# Altium PCB PCB1.pcbdoc (part 1 of 2)
Units mm, origin at the board's own origin, x right, y up, seen from the top; angles counter-clockwise.
Board outline 100 x 24 mm, 4 copper layers (Top Layer 1, GND, VCC, Bottom Layer 1), stack 0.567 mm thick; 90 components, 59 nets, 339 pads, 337 vias.
Unrouted connection lines stored in the file: 82.
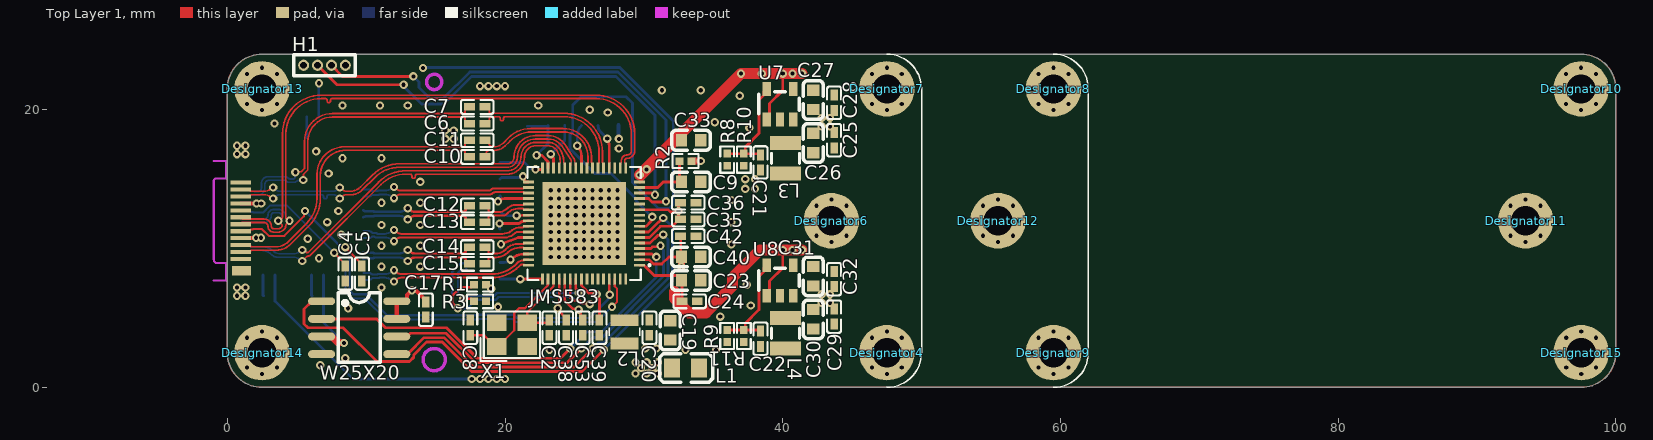
[diagram p0: Top Layer 1 view]
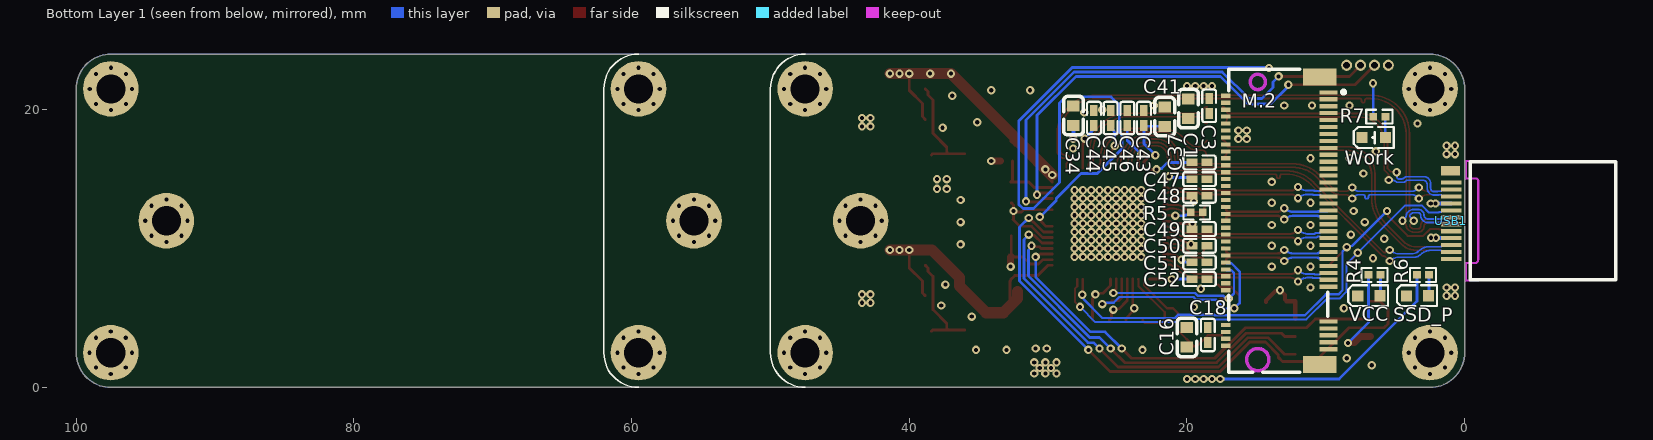
[diagram p1: Bottom Layer 1 view, seen from below]
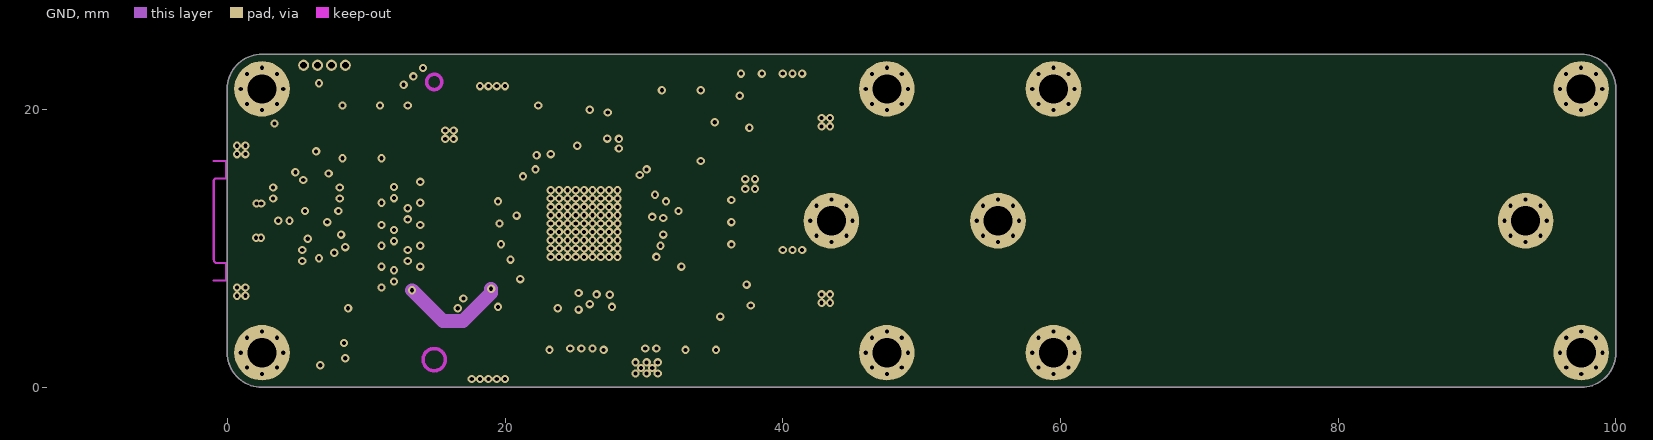
[diagram p2: GND]
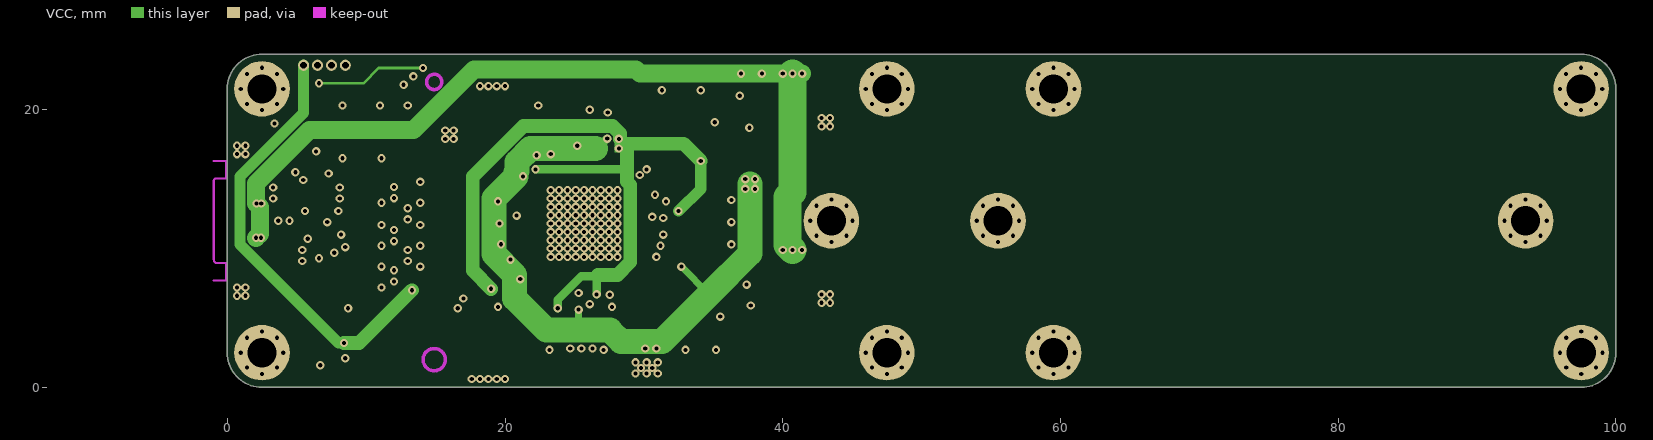
[diagram p3: VCC]

## Layer stack, top to bottom
Top Solder Mask Layer: solder mask 0.0102, Solder Resist, Dk 3.5
Top Layer 1: signal copper 0.035
Dielectric 1: prepreg 0.0711, PP-006, Dk 4.1
GND: signal copper 0.0175
Dielectric1: dielectric 0.32, FR-4, Dk 4.8
VCC: signal copper 0.0175
Dielectric 2: prepreg 0.0711, PP-006, Dk 4.1
Bottom Layer 1: signal copper 0.035
Bottom Solder Mask Layer: solder mask 0.0102, Solder Resist, Dk 3.5

## Board outline
0,2.5 0,21.5 cw(c2.5,21.5) 2.5,24 97.5,24 cw(c97.5,21.5) 100,21.5 100,2.5 cw(c97.5,2.5) 97.5,0 2.5,0 cw(c2.5,2.5)

## Design rules (kind name [scope] priority, off if disabled: settings)
AssemblyTestPointUsage [All] p0: scope1count=1 scope1_0_kind=Board scope1_0_value=Board scope2count=1 scope2_0_kind=Board scope2_0_value=Board commentlength=0
AssemblyTestpoint [All] p0: scope1count=1 scope1_0_kind=Board scope1_0_value=Board scope2count=1 scope2_0_kind=Board scope2_0_value=Board commentlength=0
BoardOutlineClearance copperThickness1oz_1 [All] p0: scope1count=1 scope1_0_kind=Board scope1_0_value=Board scope2count=1 scope2_0_kind=Board scope2_0_value=Board commentlength=0 gap=0.254
BoardOutlineClearance copperThickness2oz_1 [All] p0: scope1count=1 scope1_0_kind=Board scope1_0_value=Board scope2count=1 scope2_0_kind=Board scope2_0_value=Board commentlength=0 gap=0.254
BoardOutlineClearance copperThickness1oz_1 [All] p1: gap=0.254 ignorepadtopadclearanceinfootprint=FALSE except(0: Arc-SplitContinuation Track-SplitContinuation SMDPad-SplitContinuation THPad-SplitContinuation Via-SplitContinuation Fill-SplitContinuation Poly-SplitContinuation Region-SplitContinuation Text-SplitContinuation; 0.152: Track-CutoutEdge SMDPad-CutoutEdge THPad-CutoutEdge Via-CutoutEdge Region-CutoutEdge; 0.3: Track-OutlineEdge SMDPad-OutlineEdge THPad-OutlineEdge Via-OutlineEdge Fill-OutlineEdge Fill-CutoutEdge Poly-OutlineEdge Region-OutlineEdge Text-OutlineEdge)
BoardOutlineClearance copperThickness2oz_1 [All] p2: gap=0.254 ignorepadtopadclearanceinfootprint=FALSE except(0: Arc-SplitContinuation Track-SplitContinuation SMDPad-SplitContinuation THPad-SplitContinuation Via-SplitContinuation Fill-SplitContinuation Poly-SplitContinuation Region-SplitContinuation Text-SplitContinuation; 0.152: Track-CutoutEdge SMDPad-CutoutEdge THPad-CutoutEdge Via-CutoutEdge Region-CutoutEdge; 0.3: Track-OutlineEdge SMDPad-OutlineEdge THPad-OutlineEdge Via-OutlineEdge Fill-OutlineEdge Fill-CutoutEdge Poly-OutlineEdge Region-OutlineEdge Text-OutlineEdge)
Clearance "Stitching GND" [All] p0 off: scope1count=1 scope1_0_kind=Board scope1_0_value=Board scope2count=1 scope2_0_kind=Board scope2_0_value=Board commentlength=80 gap=0.2 // Protel DXP Scope 2 Expression Was: (IsVia and (Not IsStitchingVia)) Or IsPad
Clearance copperThickness1oz [All] p0: scope1count=1 scope1_0_kind=Board scope1_0_value=Board scope2count=1 scope2_0_kind=Board scope2_0_value=Board commentlength=0 gap=0.15
Clearance "Stitching GND" [IsStitchingVia and InNet('GND') vs (IsVia and (Not IsStitchingVia)) Or IsPad] p1: gap=0.2 ignorepadtopadclearanceinfootprint=FALSE except(0: Arc-Text Arc-Hole Track-Text Track-Hole SMDPad-Text SMDPad-Hole THPad-Text THPad-Hole Via-Text Via-Hole Fill-Text Fill-Hole Poly-Text Poly-Hole Region-Text Region-Hole Text-Text Text-Hole)
Clearance copperThickness1oz [All] p2: gap=0.15 ignorepadtopadclearanceinfootprint=FALSE except(0: Arc-Text Arc-Hole Track-Text Track-Hole SMDPad-Via SMDPad-Text SMDPad-Hole THPad-Via THPad-Text THPad-Hole Via-Text Via-Hole Fill-Text Fill-Hole Poly-Text Poly-Hole Region-Text Region-Hole Text-Text Text-Hole; 0.12: Arc-Arc Arc-Track Arc-Via Track-Track Track-Via; 0.2: Via-Via)
ComponentClearance [All] p0: scope1count=1 scope1_0_kind=Board scope1_0_value=Board scope2count=1 scope2_0_kind=Board scope2_0_value=Board commentlength=0 gap=0 collisioncheckmode=3
ComponentClearance [All] p1: gap=0 collisioncheckmode=3 verticalgap=0.254 showdistances=FALSE
DiffPairsRouting DiffPairsRouting_90oum [All] p0 off: scope1count=1 scope1_0_kind=Board scope1_0_value=Board scope2count=1 scope2_0_kind=Board scope2_0_value=Board commentlength=71 // Protel DXP Scope 1 Expression Was: InDifferentialPairClass('90oum')
DiffPairsRouting DiffPairsRouting_85oum [All] p0 off: scope1count=1 scope1_0_kind=Board scope1_0_value=Board scope2count=1 scope2_0_kind=Board scope2_0_value=Board commentlength=71 // Protel DXP Scope 1 Expression Was: InDifferentialPairClass('85oum')
DiffPairsRouting DiffPairsRouting_90oum [InDifferentialPairClass('90oum')] p1: maxlimit=0.254 minlimit=0.1 mostfreqgap=0.12 toplayer_minwidth=0.1 toplayer_maxwidth=0.381 toplayer_prefwidth=0.125 midlayer1_minwidth=0.1 midlayer1_maxwidth=0.381 midlayer1_prefwidth=0.125 midlayer2_minwidth=0.1 midlayer2_maxwidth=0.381 midlayer2_prefwidth=0.125 bottomlayer_minwidth=0.1 bottomlayer_maxwidth=0.381 bottomlayer_prefwidth=0.125 maxuncoupledlength=12.7
DiffPairsRouting DiffPairsRouting_85oum [InDifferentialPairClass('85oum')] p2: maxlimit=0.254 minlimit=0.1 mostfreqgap=0.12 toplayer_minwidth=0.1 toplayer_maxwidth=0.381 toplayer_prefwidth=0.145 midlayer1_minwidth=0.1 midlayer1_maxwidth=0.381 midlayer1_prefwidth=0.145 midlayer2_minwidth=0.1 midlayer2_maxwidth=0.381 midlayer2_prefwidth=0.145 bottomlayer_minwidth=0.1 bottomlayer_maxwidth=0.381 bottomlayer_prefwidth=0.145 maxuncoupledlength=12.7
FabricationTestPointUsage [All] p0: scope1count=1 scope1_0_kind=Board scope1_0_value=Board scope2count=1 scope2_0_kind=Board scope2_0_value=Board commentlength=0 valid=0 allowmultiple=FALSE
FabricationTestpoint [All] p0: scope1count=1 scope1_0_kind=Board scope1_0_value=Board scope2count=1 scope2_0_kind=Board scope2_0_value=Board commentlength=0 side=3 testpointundercomponent=TRUE minsize=1.016 maxsize=2.54 preferedsize=1.524 minholesize=0 maxholesize=1.016 preferedholesize=0.813 testpointgrid=0.025
FanoutControl Fanout_BGA [All] p0 off: scope1count=1 scope1_0_kind=Board scope1_0_value=Board scope2count=1 scope2_0_kind=Board scope2_0_value=Board commentlength=69 // Protel DXP Scope 1 Expression Was: IsBGA   Fanout_BGA (Default Rule)
FanoutControl Fanout_LCC [All] p0 off: scope1count=1 scope1_0_kind=Board scope1_0_value=Board scope2count=1 scope2_0_kind=Board scope2_0_value=Board commentlength=69 // Protel DXP Scope 1 Expression Was: IsLCC   Fanout_LCC (Default Rule)
FanoutControl Fanout_SOIC [All] p0 off: scope1count=1 scope1_0_kind=Board scope1_0_value=Board scope2count=1 scope2_0_kind=Board scope2_0_value=Board commentlength=71 // Protel DXP Scope 1 Expression Was: IsSOIC   Fanout_SOIC (Default Rule)
FanoutControl Fanout_Small [All] p0 off: scope1count=1 scope1_0_kind=Board scope1_0_value=Board scope2count=1 scope2_0_kind=Board scope2_0_value=Board commentlength=84 // Protel DXP Scope 1 Expression Was: (CompPinCount < 5)   Fanout_Small (Default Rule)
FanoutControl Fanout_Default [All] p0: scope1count=1 scope1_0_kind=Board scope1_0_value=Board scope2count=1 scope2_0_kind=Board scope2_0_value=Board commentlength=30 // Fanout_Default (Default Rule)
Height [All] p0: scope1count=1 scope1_0_kind=Board scope1_0_value=Board scope2count=1 scope2_0_kind=Board scope2_0_value=Board commentlength=0
HoleSize [All] p0: scope1count=1 scope1_0_kind=Board scope1_0_value=Board scope2count=1 scope2_0_kind=Board scope2_0_value=Board commentlength=0 absolutevalues=TRUE maxlimit=2.54 minlimit=0.025 maxpercent=80.000 minpercent=20.000
HoleToHoleClearance [All] p0: scope1count=1 scope1_0_kind=Board scope1_0_value=Board scope2count=1 scope2_0_kind=Board scope2_0_value=Board commentlength=0
LayerPairs [All] p0: scope1count=1 scope1_0_kind=Board scope1_0_value=Board scope2count=1 scope2_0_kind=Board scope2_0_value=Board commentlength=0 enforce=TRUE
MatchedLengths [All] p0: scope1count=1 scope1_0_kind=Board scope1_0_value=Board scope2count=1 scope2_0_kind=Board scope2_0_value=Board commentlength=0 tolerance=2 amplitude=5.08 gap=0.508 style=90-Degree
MatchedLengths [All] p1: tolerance=2 checknetsindiffpair=FALSE checkdiffpairvsdiffpair=TRUE checkxsignals=TRUE checkothers=TRUE
MinimumSolderMaskSliver [All] p0: scope1count=1 scope1_0_kind=Board scope1_0_value=Board scope2count=1 scope2_0_kind=Board scope2_0_value=Board commentlength=0
NetAntennae [All] p0: scope1count=1 scope1_0_kind=Board scope1_0_value=Board scope2count=1 scope2_0_kind=Board scope2_0_value=Board commentlength=0
PasteMaskExpansion pasteMaskExpansion [All] p0: scope1count=1 scope1_0_kind=Board scope1_0_value=Board scope2count=1 scope2_0_kind=Board scope2_0_value=Board commentlength=0 expansion=0
PasteMaskExpansion pasteMaskExpansion [All] p1: expansion=0
PlaneClearance [All] p0: scope1count=1 scope1_0_kind=Board scope1_0_value=Board scope2count=1 scope2_0_kind=Board scope2_0_value=Board commentlength=0 clearance=0.508
PlaneConnect innerPlane [All] p0: scope1count=1 scope1_0_kind=Board scope1_0_value=Board scope2count=1 scope2_0_kind=Board scope2_0_value=Board commentlength=0 planeconnectstyle=Direct reliefexpansion=0.508 reliefentries=4 reliefconductorwidth=0.254 reliefairgap=0.254
PlaneConnect innerPlane [All] p1: planeconnectstyle=Direct reliefexpansion=0.508 reliefentries=4 reliefconductorwidth=0.254 reliefairgap=0.254
PolygonConnect copperRegion [All] p0: scope1count=1 scope1_0_kind=Board scope1_0_value=Board scope2count=1 scope2_0_kind=Board scope2_0_value=Board commentlength=0 connectstyle=Direct reliefconductorwidth=0.254 reliefentries=4 polygonreliefangle="90 Angle"
PolygonConnect copperRegion [All] p1: connectstyle=Direct reliefconductorwidth=0.254 reliefentries=4 polygonreliefangle="90 Angle" airgapwidth=0.254
RoutingCorners [All] p0: scope1count=1 scope1_0_kind=Board scope1_0_value=Board scope2count=1 scope2_0_kind=Board scope2_0_value=Board commentlength=0 cornerstyle=45-Degree minsetback=2.54 maxsetback=2.54
RoutingLayers [All] p0: scope1count=1 scope1_0_kind=Board scope1_0_value=Board scope2count=1 scope2_0_kind=Board scope2_0_value=Board commentlength=0 top layer=Automatic mid layer 1=Automatic mid layer 2=Automatic bottom layer=Automatic
RoutingPriority [All] p0: scope1count=1 scope1_0_kind=Board scope1_0_value=Board scope2count=1 scope2_0_kind=Board scope2_0_value=Board commentlength=0
RoutingTopology [All] p0: scope1count=1 scope1_0_kind=Board scope1_0_value=Board scope2count=1 scope2_0_kind=Board scope2_0_value=Board commentlength=0 topology=Shortest
RoutingVias viaSize [All] p0: scope1count=1 scope1_0_kind=Board scope1_0_value=Board scope2count=1 scope2_0_kind=Board scope2_0_value=Board commentlength=0 holewidth=0.305 width=0.61 viastyle="Through Hole" minholewidth=0.3 minwidth=0.5 maxholewidth=6.3 maxwidth=10
RoutingVias viaSize [All] p1: holewidth=0.305 width=0.61 viastyle="Through Hole" minholewidth=0.3 minwidth=0.5 maxholewidth=6.3 maxwidth=10
ShortCircuit [All] p0: scope1count=1 scope1_0_kind=Board scope1_0_value=Board scope2count=1 scope2_0_kind=Board scope2_0_value=Board commentlength=0 allowed=FALSE
SilkToBoardRegionClearance [All] p0: scope1count=1 scope1_0_kind=Board scope1_0_value=Board scope2count=1 scope2_0_kind=Board scope2_0_value=Board commentlength=0
SilkToSilkClearance [All] p0: scope1count=1 scope1_0_kind=Board scope1_0_value=Board scope2count=1 scope2_0_kind=Board scope2_0_value=Board commentlength=0
SilkToSilkClearance [All] p1: silktosilkclearance=0
SilkToSolderMaskClearance [All] p0 off: scope1count=1 scope1_0_kind=Board scope1_0_value=Board scope2count=1 scope2_0_kind=Board scope2_0_value=Board commentlength=44 // Protel DXP Scope 1 Expression Was: IsPad
SilkToSolderMaskClearance [IsPad] p1: minsilkscreentomaskgap=0 clearancetoexposedcopper=TRUE
SolderMaskExpansion solderMaskExpansion [All] p0: scope1count=1 scope1_0_kind=Board scope1_0_value=Board scope2count=1 scope2_0_kind=Board scope2_0_value=Board commentlength=0 expansion=0.051
SolderMaskExpansion solderMaskExpansion [All] p1: expansion=0.051 istentingtop=FALSE useseparateexpansions=TRUE expansionbottom=0.051 istentingbottom=FALSE
SupplyNets "Schematic Supply Nets_5" [All] p0: scope1count=1 scope1_0_kind=Net scope1_0_value=VCC scope2count=1 scope2_0_kind=Board scope2_0_value=Board commentlength=0 voltage=0.000
SupplyNets "Schematic Supply Nets_4" [All] p0: scope1count=1 scope1_0_kind=Net scope1_0_value=M.2_3V3 scope2count=1 scope2_0_kind=Board scope2_0_value=Board commentlength=0 voltage=0.000
SupplyNets "Schematic Supply Nets_3" [All] p0: scope1count=1 scope1_0_kind=Net scope1_0_value=AVDDL scope2count=1 scope2_0_kind=Board scope2_0_value=Board commentlength=0 voltage=0.000
SupplyNets "Schematic Supply Nets_2" [All] p0: scope1count=1 scope1_0_kind=Net scope1_0_value=GND scope2count=1 scope2_0_kind=Board scope2_0_value=Board commentlength=0 voltage=0.000
SupplyNets "Schematic Supply Nets_1" [All] p0: scope1count=1 scope1_0_kind=Net scope1_0_value=VDDREG scope2count=1 scope2_0_kind=Board scope2_0_value=Board commentlength=0 voltage=0.000
SupplyNets "Schematic Supply Nets" [All] p0: scope1count=1 scope1_0_kind=Net scope1_0_value=3V3 scope2count=1 scope2_0_kind=Board scope2_0_value=Board commentlength=0 voltage=0.000
SupplyNets "Schematic Supply Nets_5" [InNet('VCC')] p1: voltage=0.000
SupplyNets "Schematic Supply Nets_4" [InNet('M.2_3V3')] p2: voltage=0.000
SupplyNets "Schematic Supply Nets_3" [InNet('AVDDL')] p3: voltage=0.000
SupplyNets "Schematic Supply Nets_2" [InNet('GND')] p4: voltage=0.000
SupplyNets "Schematic Supply Nets_1" [InNet('VDDREG')] p5: voltage=0.000
SupplyNets "Schematic Supply Nets" [InNet('3V3')] p6: voltage=0.000
UnRoutedNet [All] p0: scope1count=1 scope1_0_kind=Board scope1_0_value=Board scope2count=1 scope2_0_kind=Board scope2_0_value=Board commentlength=0
UnpouredPolygon [All] p0: scope1count=1 scope1_0_kind=Board scope1_0_value=Board scope2count=1 scope2_0_kind=Board scope2_0_value=Board commentlength=0
Width copperThickness1oz_2 [All] p0: scope1count=1 scope1_0_kind=Board scope1_0_value=Board scope2count=1 scope2_0_kind=Board scope2_0_value=Board commentlength=0 maxlimit=2.54 minlimit=0.127 preferedwidth=0.254
Width copperThickness1oz_2 [All] p1: maxlimit=2.54 minlimit=0.127 preferedwidth=0.254
24 further rules are at their usual default settings.

## Classes and differential pairs
component class 1_P1: C1 C2 C3 C4 C5 C6 C7 C8 C9 C10 C11 C12 C13 C14 C15 C16 C17 C18 C19 C20 C21 C22 C23 C24 C25 C26 C27 C28 C29 C30 C31 C32 C33 C34 C35 C36 C37 C38 C39 C40 C41 C42 C43 C44 C45 C46 C47 C48 C49 C50 C51 C52 C53 H1 JMS583 L1 L2 L3 L4 M.2 R1 R2 R3 R4 R5 R6 R7 R8 R9 R10 R11 SSD_P U7 U8 USB1 VCC W25X20 Work X1
differential pair U_TX2: +U_TX2_P -U_TX2_N
differential pair N_P1_TX: +N_P1_TX_P -N_P1_TX_N
differential pair N_P0_TX: +N_P0_TX_N -N_P0_TX_P
differential pair U_TX1: +U_TX1_P -U_TX1_N
differential pair P1_TX: +P1_TX_P -P1_TX_N
differential pair P1_RX: +P1_RX_P -P1_RX_N
differential pair P0_TX: +P0_TX_P -P0_TX_N
differential pair P0_RX: +P0_RX_P -P0_RX_N
differential pair CLK: +CLK_P -CLK_N
differential pair TX2: +TX2_P -TX2_N
differential pair TX1: +TX1_P -TX1_N
differential pair RX2: +RX2_P -RX2_N
differential pair RX1: +RX1_P -RX1_N
differential pair " ": +D_P -D_N

## Components (designator, comment, footprint, x,y, rotation, side; value= is the part's Value field where it differs from the comment)
C1 "10uF" C0603 19.9,20.075 r270 bottom
C2 "20pF" C0402 23.2,4.3 r90 top
C3 "100nF" C0402 18.4,20.275 r90 bottom
C4 "330pF" C0402 8.5,8.2 r270 top
C5 "330pF" C0402 9.7,8.2 r270 top
C6 "100nF" C0402 18,19 r0 top
C7 "100nF" C0402 18,20.2 r0 top
C8 "20pF" C0402 17.5,4.3 r270 top
C9 "10uF" C0603 33.4,14.8 r180 top
C10 "100nF" C0402 18,16.6 r0 top
C11 "100nF" C0402 18,17.8 r0 top
C12 "220nF" C0402 18,13.1 r180 top
C13 "220nF" C0402 18,11.9 r180 top
C14 "220nF" C0402 18,10.1 r180 top
C15 "220nF" C0402 18,8.9 r180 top
C16 "10uF" C0603 20,3.6 r90 bottom
C17 "100nF" C0402 14.3,5.6 r90 top
C18 "100nF" C0402 18.5,3.775 r270 bottom
C19 "10uF" C0603 31.9,4.1 r270 top
C20 "100nF" C0402 30.4,4.3 r270 top
C21 "22pF" C0402 38.4,16.2 r90 top
C22 "22pF" C0402 38.4,3.5 r90 top
C23 "10uF" C0603 33.4,7.7 r180 top
C24 "100nF" C0402 33.3,6.2 r180 top
C25 "100nF" C0402 43.7,17.8 r270 top
C26 "10uF" C0603 42.2,17.6 r270 top
C27 "10uF" C0603 42.2,20.7 r90 top
C28 "100nF" C0402 43.7,20.5 r90 top
C29 "100nF" C0402 43.7,5.1 r270 top
C30 "10uF" C0603 42.2,4.9 r270 top
C31 "10uF" C0603 42.2,8 r90 top
C32 "100nF" C0402 43.7,7.8 r90 top
C33 "1uF" C0603 33.4,17.8 r180 top
C34 "1uF" C0603 28.175,19.575 r270 bottom
C35 "100nF" C0402 33.2,12.1 r180 top
C36 "100nF" C0402 33.2,13.3 r180 top
C37 "100nF" C0402 19.1,16.2 r0 bottom
C38 "100nF" C0402 24.4,4.3 r90 top
C39 "100nF" C0402 26.8,4.3 r90 top
C40 "4.7uF" C0603 33.4,9.4 r180 top
C41 "4.7uF" C0603 21.6,19.5 r270 bottom
C42 "100nF" C0402 33.2,10.9 r180 top
C43 "100nF" C0402 23.1,19.4 r270 bottom
C44 "100nF" C0402 26.7,19.4 r270 bottom
C45 "100nF" C0402 25.5,19.4 r270 bottom
C46 "100nF" C0402 24.3,19.4 r270 bottom
C47 "100nF" C0402 19.1,15 r0 bottom
C48 "100nF" C0402 19.1,13.8 r0 bottom
C49 "100nF" C0402 19.1,11.4 r0 bottom
C50 "100nF" C0402 19.1,10.2 r0 bottom
C51 "100nF" C0402 19.1,9 r0 bottom
C52 "100nF" C0402 19.1,7.8 r0 bottom
C53 "100nF" C0402 25.6,4.3 r90 top
Designator4 "Comment" M2_HOLE 47.5,2.5 r0 top
Designator6 "Comment" M2_HOLE 43.503,12 r0 top
Designator7 "Comment" M2_HOLE 47.5,21.5 r0 top
Designator8 "Comment" M2_HOLE 59.5,21.5 r0 top
Designator9 "Comment" M2_HOLE 59.5,2.5 r0 top
Designator10 "Comment" M2_HOLE 97.5,21.5 r0 top
Designator11 "Comment" M2_HOLE 93.5,12 r0 top
Designator12 "Comment" M2_HOLE 55.503,12 r0 top
Designator13 "Comment" M2_HOLE 2.5,21.5 r0 top locked
Designator14 "Comment" M2_HOLE 2.5,2.5 r0 top locked
Designator15 "Comment" M2_HOLE 97.503,2.5 r0 top
H1 "ZX-PZ1.0-1-4PZZ" HDR-TH_ZX-PZ1.0-1-4PZZ 7,23.2 r0 top
JMS583 "JMS583" QFN-64_L8.0-W8.0-P0.40-TL-EP6.0 25.7,11.8 r180 top locked (schematic designator U6)
L1 "BLM21PG600SN1D" L0805 33,1.4 r180 top
L2 "4.7uH" IND-SMD_L2.5-W2.0-VLS252012CX-150M 28.6,4 r90 top
L3 "2.2uH" IND-SMD_L2.5-W2.0_MHCHL2520 40.2,16.5 r90 top
L4 "2.2uH" IND-SMD_L2.5-W2.0_MHCHL2520 40.2,3.9 r90 top
M.2 "91302-225-067RCM" CONN-SMD_91302-225-067RCM 13.5,12 r270 bottom locked (schematic designator U1)
R1 "4.7kΩ" R0402 18.2,7.4 r0 top
R2 "50k" R0402 33,16.3 r180 top
R3 "4.7kΩ" R0402 18.2,6.2 r0 top
R4 "10kΩ" R0402 6.5,8.1 r180 bottom
R5 "12kΩ_1%" R0402 19.3,12.6 r180 bottom
R6 "10kΩ" R0402 3,8.1 r180 bottom
R7 "10kΩ" R0402 6.149,19.496 r180 bottom
R8 "150kΩ_1%" R0402 36,16.4 r90 top
R9 "22.1kΩ_1%" R0402 36,3.7 r90 top
R10 "100kΩ_1%" R0402 37.2,16.4 r270 top
R11 "100kΩ_1%" R0402 37.2,3.7 r270 top
SSD_P "LED_绿" LED0603-RD_GREEN 3.4,6.6 r180 bottom (schematic designator U3)
U7 "ETA3409S2F" SOT-23-5_L2.9-W1.6-P0.95-LS2.8-BL 39.8,20.4 r0 top
U8 "ETA3409S2F" SOT-23-5_L2.9-W1.6-P0.95-LS2.8-BL 39.8,7.7 r0 top
USB1 "U261-241N-4BS60" USB-TYPE-C-SMD_U261-241N-4BS60 1,12 r90 bottom locked
VCC "LED_绿" LED0603-RD_GREEN 6.9,6.6 r180 bottom (schematic designator U2)
W25X20 "W25X20CLSNIG" SOIC-8_L5.0-W4.0-P1.27-LS6.0-BL 9.5,4.3 r270 top (schematic designator U4)
Work "LED_蓝" LED0603-R-RD 6.549,17.996 r180 bottom (schematic designator U5)
X1 "25MHz" CRYSTAL-SMD_4P-L3.2-W2.5-BL 20.5,3.8 r0 top

## Footprints (in the part's own frame and the unit in brackets; to place one, negate y for a bottom-side part, rotate by r counter-clockwise, add the part's x,y. Pads: shape width x height; smd on the part's side, far side on the other; paste and mask are expansions set on the pad)
C0402 [mm]
  rect 0.79x0.54 smd paste-100 mask+0: 1(-0.545,0) 2(0.545,0)
  silkscreen extent -1.17,-0.5 1.17,0.5
C0603 [mm]
  rect 0.8x0.9 smd: 1(-0.7,0) 2(0.7,0)
  silkscreen extent -1.39,-0.71 1.39,0.71
CONN-SMD_91302-225-067RCM [mm]
  rect 0.3x1.3 smd: 1(-9.25,3.7) 3(-8.75,3.7) 5(-8.25,3.7) 7(-7.75,3.7) 9(-7.25,3.7) 11(-6.75,3.7) 13(-6.25,3.7) 15(-5.75,3.7) 17(-5.25,3.7) 19(-4.75,3.7) 21(-4.25,3.7) 23(-3.75,3.7) 25(-3.25,3.7) 27(-2.75,3.7) 29(-2.25,3.7) 31(-1.75,3.7) 33(-1.25,3.7) 35(-0.75,3.7) 37(-0.25,3.7) 39(0.25,3.7) 41(0.75,3.7) 43(1.25,3.7) 45(1.75,3.7) 47(2.25,3.7) 49(2.75,3.7) 51(3.25,3.7) 53(3.75,3.7) 55(4.25,3.7) 57(4.75,3.7) 67(7.25,3.7) 69(7.75,3.7) 71(8.25,3.7) 73(8.75,3.7) 75(9.25,3.7)
  rect 0.3x0.7 smd: 2(-9,-3.7) 4(-8.5,-3.7) 6(-8,-3.7) 8(-7.5,-3.7) 10(-7,-3.7) 12(-6.5,-3.7) 14(-6,-3.7) 16(-5.5,-3.7) 18(-5,-3.7) 20(-4.5,-3.7) 22(-4,-3.7) 24(-3.5,-3.7) 26(-3,-3.7) 28(-2.5,-3.7) 30(-2,-3.7) 32(-1.5,-3.7) 34(-1,-3.7) 36(-0.5,-3.7) 38(0,-3.7) 40(0.5,-3.7) 42(1,-3.7) 44(1.5,-3.7) 46(2,-3.7) 48(2.5,-3.7) 50(3,-3.7) 52(3.5,-3.7) 54(4,-3.7) 56(4.5,-3.7) 58(5,-3.7) 68(7.5,-3.7) 70(8,-3.7) 72(8.5,-3.7) 74(9,-3.7)
  rect 1.2x2.4 smd: 76(-10.35,3.05) 77(10.35,3.05)
  Board Outline Layer circle w0.254: c10,-1.4 r0.8
  Board Outline Layer circle w0.005: c10,-1.4 r0.8
  Board Outline Layer circle w0.254: c-10,-1.4 r0.55
  Board Outline Layer circle w0.005: c-10,-1.4 r0.55
  silkscreen extent -10.92,-3.5 10.92,4.9
CRYSTAL-SMD_4P-L3.2-W2.5-BL [mm]
  rect 1.4x1.2 smd: 1(-1.1,-0.85) 2(1.1,-0.85) 3(1.1,0.85) 4(-1.1,0.85)
  silkscreen extent -2.26,-1.91 2.03,1.68
HDR-TH_ZX-PZ1.0-1-4PZZ [mm]
  round 0.8 hole 0.5: 1(-1.5,0) 2(-0.5,0) 3(0.5,0) 4(1.5,0)
  silkscreen extent -2.2,-0.75 2.2,0.75
IND-SMD_L2.5-W2.0-VLS252012CX-150M [mm]
  rect 0.85x2 smd: 1(-0.83,0) 2(0.83,0)
  silkscreen extent -0.29,-1.1 0.29,1.1
IND-SMD_L2.5-W2.0_MHCHL2520 [mm]
  rect 1x2.2 smd: 1(-1.1,0) 2(1.1,0)
  silkscreen extent -0.37,-1 0.37,1
L0805 [mm]
  rect 1.133x1.377 smd paste-100 mask+0: 1(-0.966,0) 2(0.966,0)
  silkscreen extent -1.95,-1.02 1.86,1.02
LED0603-R-RD [mm]
  rect 0.8x0.8 smd: 1(0.851,0) 2(-0.851,0)
  silkscreen extent -1.44,-0.75 1.44,0.75
LED0603-RD_GREEN [mm]
  rect 0.8x0.8 smd: 1(-0.799,-0.003) 2(0.799,0.003)
  silkscreen extent -1.49,-0.75 1.39,0.76
M2_HOLE [mm]
  round 4 hole 2.1: 16(0,0)
QFN-64_L8.0-W8.0-P0.40-TL-EP6.0 [mm]
  rect 0.8x0.2 smd paste-100 mask+0: 1(-4,3) 2(-4,2.6) 3(-4,2.2) 4(-4,1.8) 5(-4,1.4) 6(-4,1) 7(-4,0.6) 8(-4,0.2) 9(-4,-0.2) 10(-4,-0.6) 11(-4,-1) 12(-4,-1.4) 13(-4,-1.8) 14(-4,-2.2) 15(-4,-2.6) 16(-4,-3) 33(4,-3) 34(4,-2.6) 35(4,-2.2) 36(4,-1.8) 37(4,-1.4) 38(4,-1) 39(4,-0.6) 40(4,-0.2) 41(4,0.2) 42(4,0.6) 43(4,1) 44(4,1.4) 45(4,1.8) 46(4,2.2) 47(4,2.6) 48(4,3)
  rect 0.2x0.8 smd paste-100 mask+0: 17(-3,-4) 18(-2.6,-4) 19(-2.2,-4) 20(-1.8,-4) 21(-1.4,-4) 22(-1,-4) 23(-0.6,-4) 24(-0.2,-4) 25(0.2,-4) 26(0.6,-4) 27(1,-4) 28(1.4,-4) 29(1.8,-4) 30(2.2,-4) 31(2.6,-4) 32(3,-4) 49(3,4) 50(2.6,4) 51(2.2,4) 52(1.8,4) 53(1.4,4) 54(1,4) 55(0.6,4) 56(0.2,4) 57(-0.2,4) 58(-0.6,4) 59(-1,4) 60(-1.4,4) 61(-1.8,4) 62(-2.2,4) 63(-2.6,4) 64(-3,4)
  rect 6x6 smd paste-100 mask+0: 65(0,0)
  silkscreen extent -4.77,-4.08 4.08,4.08
R0402 [mm]
  rect 0.566x0.54 smd paste-100 mask+0: 1(-0.433,0) 2(0.433,0)
  silkscreen extent -0.94,-0.5 0.94,0.5
SOIC-8_L5.0-W4.0-P1.27-LS6.0-BL [mil]
  oval 22.38x76.78 smd: 1(-75,-106.5) 2(-25,-106.5) 3(25,-106.5) 4(75,-106.5) 5(75,106.5) 6(25,106.5) 7(-25,106.5) 8(-75,106.5)
  silkscreen extent -98,-59 98,59
SOT-23-5_L2.9-W1.6-P0.95-LS2.8-BL [mm]
  rect 0.6x1 smd paste+0 mask+0: 1(-0.95,-1.1) 2(0,-1.1) 3(0.95,-1.1) 4(0.95,1.1) 5(-0.95,1.1)
  silkscreen extent -1.52,-0.7 1.4,0.89
USB-TYPE-C-SMD_U261-241N-4BS60 [mm]
  rect 0.7x1.4 smd far side paste+0 mask+0: 1(-3.6,0.025)
  rect 0.7x1.4 smd paste+0 mask+0: 2(3.6,0.025)
  rect 0.3x1.5 smd paste+0 mask+0: A1(2.75,-0.025) A2(2.25,-0.025) A3(1.75,-0.025) A4(1.25,-0.025) A5(0.75,-0.025) A6(0.25,-0.025) A7(-0.25,-0.025) A8(-0.75,-0.025) A9(-1.25,-0.025) A10(-1.75,-0.025) A11(-2.25,-0.025) A12(-2.75,-0.025)
  rect 0.3x1.5 smd far side paste+0 mask+0: B1(-2.75,-0.025) B2(-2.25,-0.025) B3(-1.75,-0.025) B4(-1.25,-0.025) B5(-0.75,-0.025) B6(-0.25,-0.025) B7(0.25,-0.025) B8(0.75,-0.025) B9(1.25,-0.025) B10(1.75,-0.025) B11(2.25,-0.025) B12(2.75,-0.025)
  Board Outline Layer lines w0.15: 2.86,-1.975 ccw(c2.86,-1.785) 3.05,-1.785 ; 2.86,-1.975 ccw(c2.86,-1.785) 3.05,-1.785 ; 2.86,-1.975 -2.741,-1.975 2.86,-1.975 ; 3.05,-1.785 3.05,-1.075 ; 3.05,-1.785 3.05,-1.075 ; -3.05,-1.719 ccw(c-2.794,-1.719) -2.794,-1.975 cw(c-2.794,-1.719) -3.05,-1.719 ; -3.05,-1.719 -3.05,-1.7 ; -3.05,-1.719 -3.05,-1.7 ; -3.05,-1.7 -3.05,-1.075 ; -3.05,-1.7 -3.05,-1.075 ; -4.3,-1.075 -4.3,-1.975 -4.3,-1.075 ; -4.3,-1.075 -3.05,-1.075 ; -4.3,-1.075 -3.05,-1.075 ; 3.05,-1.075 4.3,-1.075 ; 3.05,-1.075 4.3,-1.075 ; 4.3,-1.075 4.3,-1.975 4.3,-1.075
  silkscreen extent -4.25,-11.89 4.25,-1.38

## Part data
C1 C9 C16 C19 C23 C26 C27 C30 C31 C33 C34 C40 C41: library part CAP_0603
C2 C3 C4 C5 C6 C7 C8 C10 C11 C12 C13 C14 C15 C17 C18 C20 C21 C22 C24 C25 C28 C29 C32 C35 C36 C37 C38 C39 C42 C43 C44 C45 C46 C47 C48 C49 C50 C51 C52 C53: library part CL05B104KB54PNC
L2: library part FTC252010S4R7MBCA
L3 L4: library part FTC252012S2R2MBCA
R1 R2 R3 R4 R5 R6 R7 R8 R9 R10 R11: library part 0402WGF1002TCE
SSD_P VCC: library part XL-1608PGC-06
Work: library part XL-1608UBC-06A
X1: library part XL2EL89CSI-111YLC-25M

## Via types
v1: diameter 0.6, hole 0.3, Top Layer 1 to Bottom Layer 1, 337 vias

## Nets (pads, with @x,y where several pads share a name; then routed paths per layer and width w, separated by ;. In a path a pad name is that pad's centre, name@x,y a point inside that pad or via, vN(x,y) a via of type N, cw(c..) or ccw(c..) an arc to the next point about the centre after c; other vN are vias at no path point)
3V3: C22.1 C29.2 C30.2 L1.1 L4.1 R11.2
AVDDL: C19.2 C20.2 C21.1 C25.2 C26.2 C40.2 C41.2 C42.2 C43.2 C44.2 C45.2 C46.2 C47.2 C48.2 C49.2 C50.2 C51.2 C52.2 C53.2 JMS583.2 JMS583.20 JMS583.25 JMS583.30 JMS583.31 JMS583.33 JMS583.36 JMS583.40 JMS583.43 JMS583.46 JMS583.49 JMS583.53 L2.1 L3.1 R10.2 | length 89.4
  Top Layer 1 w0.2: v1(19.5,13.4) cw(c19.983,12.917) 19.983,13.6 JMS583.36@21.7,13.6 ; v1(19.6,11.8) 20.904,11.8 ccw(c20.903,12) 20.938,11.803 cw(c21.21,10.285) 21.003,11.813 ccw(c20.975,12.011) 21.119,11.872 cw(c21.3,11.7) 21.27,11.948 JMS583.40@21.7,12 ; v1(19.717,10.308) 19.923,10.402 cw(c20.007,10.22) 19.938,10.408 20.429,10.588 ccw(c19.976,11.824) 20.458,10.599 20.934,10.786 cw(c21.007,10.6) 21.007,10.8 JMS583.43@21.7,10.8 ; v1(20.4,9.2) cw(c21.366,8.234) 21.366,9.6 JMS583.46@21.7,9.6 ; v1(21.1,7.8) JMS583.49@22.7,7.8 ; v1(21.3,15.2) 21.3,15.092 21.4,14.992 21.4,14.8 JMS583.33@21.7,14.8 ; v1(22.277,16.723) 22.63,16.723 23.1,16.253 JMS583.31@23.1,15.8 ; v1(23.3,16.8) 23.3,16.698 23.5,16.498 JMS583.30@23.5,15.8 ; JMS583.53@24.3,7.8 24.3,6.27 24.911,5.659 25.241,5.659 v1(25.3,5.6) 25.3,5.492 25.43,5.362 25.43,5.015 C53.2@25.6,4.845 ; v1(25.2,17.4) cw(c24.475,16.675) 25.5,16.675 JMS583.25@25.5,15.8 ; v1(27.361,17.919) 27.459,17.651 cw(c26.817,17.417) 27.5,17.417 JMS583.20@27.5,15.8 ; JMS583.2@29.7,9.2 30.365,9.2 30.685,8.88 31.282,8.88 31.802,9.4 C40.2@32.7,9.4 v1(32.7,8.7) ; C40.2@32.655,9.445 C42.2@32.655,10.9
  Top Layer 1 w0.5: C40.2@32.655,9.445 C40.2@32.7,9.4 v1(32.7,8.7)
  VCC w0.5: 25.263,4.12 25.3,4.157 v1(25.3,5.6) ; v1(32.7,8.7) 34.7,6.7
  VCC w0.6: 26.5,17.2 26.642,17.2 v1(27.361,17.919)
  VCC w1.8: 26.5,17.2 21.833,17.2 20.88,16.247 20.88,15.58 20.8,15.5 20.8,15.2 19.2,13.6 19.2,9.6 20.7,8.1 20.7,6.4 22.98,4.12 25.263,4.12 27.547,4.12 28.367,3.3 31.3,3.3 34.7,6.7 37.656,9.656 37.656,14.664
  Bottom Layer 1 w0.172: v1(19.5,13.4) 19.5,13.655 C48.2@19.645,13.8 19.715,13.73 C48.2@19.715,13.615
  Bottom Layer 1 w0.2: v1(19.6,11.8) 19.6,11.509 ccw(c19.754,11.509) C49.2@19.645,11.4 ; C52.2@19.645,7.8 v1(21.1,7.8) ; C51.2@19.645,9 19.917,9 ccw(c19.917,9.683) v1(20.4,9.2) ; C47.2@19.645,15 19.769,15.123 21.223,15.123 v1(21.3,15.2) ; C41.2@21.6,18.8 23.045,18.8 C43.2@23.1,18.855 23.1,17.547 v1(22.277,16.723) ; v1(23.3,16.8) 24.3,17.8 C46.2@24.3,18.855 ; v1(25.2,17.4) 25.2,18.131 cw(c26.224,18.131) C45.2@25.5,18.855 ; C44.2@26.7,18.855 ccw(c27.364,18.855) 26.894,18.386 v1(27.361,17.919)
  other v1: 30.1,2.8 30.9,2.8 37.3,14.3 38,14.3 37.3,15 38,15
CC1: C4.1 JMS583.62 USB1.A5 | length 35.6
  Top Layer 1 w0.15: v1(27.7,5.8) 28.075,6.175 28.075,7.117 27.905,7.287 27.905,7.795 JMS583.62@27.9,7.8
  Top Layer 1 w0.17: v1(7.7,9.7) 7.7,9.67 8.5,8.87 C4.1@8.5,8.745
  Bottom Layer 1 w0.15: USB1.A5@0.975,12.75 1.575,12.75 1.69,12.635 1.822,12.635 1.857,12.6 2.578,12.6 3.065,13.088 4.312,13.088 v1(7.7,9.7) 8.52,8.88 8.52,6.884 9.004,6.4 9.904,6.4 11.404,4.9 18.097,4.9 18.137,4.94 20.529,4.94 20.768,4.7 26.6,4.7 v1(27.7,5.8)
CC2: C5.1 JMS583.61 USB1.B5 | length 36.4
  Top Layer 1 w0.15: USB1.B5@0.975,11.25 1.575,11.25 1.69,11.365 1.822,11.365 1.857,11.4 2.502,11.4 2.99,10.913 4.102,10.913 5.518,12.329 5.518,12.618 v1(5.6,12.7)
  Top Layer 1 w0.17: v1(8.5,10.1) 8.5,10.07 9.7,8.87 C5.1@9.7,8.745 ; JMS583.61@27.5,7.8 27.515,7.785 27.515,6.702 v1(27.54,6.677)
  Bottom Layer 1 w0.15: v1(5.6,12.7) 8.118,10.182
  Bottom Layer 1 w0.17: 8.118,10.182 8.418,10.182 v1(8.5,10.1) 8.5,10.085 8.8,9.785 8.8,7 9.1,6.7 10,6.7 11.505,5.195 17.996,5.195 18.021,5.22 20.645,5.22 20.864,5 26.1,5 27.458,6.358 27.458,6.594 v1(27.54,6.677)
CLK_N: JMS583.47 M.2.53 | length 12.4
  Top Layer 1 w0.145: v1(12,8.433) cw(c12,8.324) 12.077,8.401 12.179,8.299 ccw(c12.502,8.622) 12.502,8.165 19.038,8.165 ccw(c19.038,10.705) 20.834,8.909 20.897,8.972 cw(c21.285,8.584) 21.285,9.133 ccw(c21.285,9.248) 21.366,9.166 cw(c21.448,9.085) 21.448,9.2 JMS583.47@21.7,9.2
  Bottom Layer 1 w0.145: M.2.53@9.8,8.25 10.217,8.25 cw(c10.217,8.049) 10.359,8.191 ccw(c10.5,8.333) 10.5,8.133 10.774,8.133 ccw(c10.774,8.188) 10.813,8.149 cw(c10.853,8.11) 10.853,8.165 11.354,8.165 ccw(c11.354,8.97) 11.923,8.401 cw(c12,8.324) v1(12,8.433)
CLK_P: JMS583.48 M.2.55 | length 12.4
  Top Layer 1 w0.145: v1(12,7.633) ccw(c12,7.741) 12.077,7.664 12.179,7.766 cw(c12.502,7.443) 12.502,7.9 19.038,7.9 ccw(c19.038,10.705) 21.021,8.722 21.085,8.785 cw(c21.285,8.584) 21.285,8.868 cw(c21.285,8.752) 21.366,8.834 ccw(c21.448,8.915) 21.448,8.8 JMS583.48@21.7,8.8
  Bottom Layer 1 w0.145: M.2.55@9.8,7.75 10.217,7.75 ccw(c10.217,7.951) 10.359,7.809 cw(c10.5,7.667) 10.5,7.868 10.884,7.868 ccw(c10.884,7.923) 10.923,7.884 cw(c10.962,7.845) 10.962,7.9 11.354,7.9 cw(c11.354,7.095) 11.923,7.664 ccw(c12,7.741) v1(12,7.633)
D_N: JMS583.17 USB1.A7 USB1.B7 | length 46
  Top Layer 1 w0.125: USB1.B7@0.975,12.25 ccw(c1.102,12.25) 1.102,12.122 2.653,12.122 cw(c2.653,11.6) 3.175,11.6 ccw(c3.35,11.6) 3.35,11.425 3.674,11.425 ccw(c3.674,11.703) 3.871,11.507 3.916,11.551 ccw(c3.827,11.64) 3.952,11.64 ccw(c3.827,11.64) 3.916,11.728 3.697,11.947 cw(c3.75,12) v1(3.675,12) ; v1@3.697,12.053 ccw(c3.75,12) v1(3.675,12) ; JMS583.17@28.7,15.8 28.7,16.045 ccw(c28.568,16.045) 28.661,16.139 cw(c28.755,16.232) 28.622,16.232 28.622,16.322 cw(c28.8,16.322) 28.8,16.5 ccw(c28.8,17.045) 29.345,17.045 29.345,18.26 ccw(c26.56,18.26) 26.56,21.045 6.756,21.045 ccw(c6.756,18.261) 3.972,18.261 3.972,12.297 cw(c3.675,12.297) v1(3.675,12)
  Bottom Layer 1 w0.125: USB1.A7@0.975,11.75 cw(c1.102,11.75) 1.102,11.877 2.652,11.877 ccw(c2.652,12.4) 3.175,12.4 cw(c3.35,12.4) 3.35,12.575 3.674,12.575 cw(c3.674,12.297) 3.871,12.493 3.916,12.449 cw(c3.827,12.36) 3.952,12.36 cw(c3.827,12.36) 3.916,12.272 3.697,12.053 ccw(c3.75,12) v1(3.675,12)
D_P: JMS583.18 USB1.A6 USB1.B6 | length 46.3
  Top Layer 1 w0.125: USB1.B6@0.975,11.75 cw(c1.102,11.75) 1.102,11.877 2.653,11.877 cw(c2.653,11.6) 2.93,11.6 ccw(c3.35,11.6) 3.35,11.18 3.674,11.18 ccw(c3.674,11.703) 4.044,11.333 4.125,11.414 ccw(c3.95,11.589) 4.197,11.589 cw(c4.445,11.589) 4.27,11.764 4.453,11.947 ccw(c4.4,12) v1(4.475,12) ; v1@4.453,12.053 cw(c4.4,12) v1(4.475,12) ; JMS583.18@28.3,15.8 28.3,16.045 cw(c28.432,16.045) 28.339,16.139 ccw(c28.245,16.232) 28.377,16.232 28.377,16.322 cw(c28.8,16.322) 28.8,16.745 ccw(c28.8,17.045) 29.1,17.045 29.1,18.26 ccw(c26.56,18.26) 26.56,20.8 7.9,20.8 7.56,20.8 ccw(c7.56,20.675) 7.435,20.675 7.435,20.622 cw(c7.312,20.622) 7.312,20.5 cw(c7.312,20.622) 7.19,20.622 7.19,20.675 ccw(c7.065,20.675) 7.065,20.8 6.757,20.8 ccw(c6.757,18.26) 4.217,18.26 4.217,12.258 ccw(c4.475,12.258) v1(4.475,12)
  Bottom Layer 1 w0.125: USB1.A6@0.975,12.25 ccw(c1.102,12.25) 1.102,12.122 2.652,12.122 ccw(c2.652,12.4) 2.93,12.4 cw(c3.35,12.4) 3.35,12.82 3.674,12.82 cw(c3.674,12.297) 4.044,12.667 4.125,12.586 cw(c3.95,12.411) 4.197,12.411 ccw(c4.445,12.411) 4.27,12.236 4.453,12.053 cw(c4.4,12) v1(4.475,12)